# Altium PCB PCB1.PcbDoc
Units mil, origin at the board's own origin, x right, y up, seen from the top; angles counter-clockwise.
Board outline 2845 x 3665 mil, 2 copper layers (Top Layer, Bottom Layer); 35 components, 23 nets, 94 pads, 9 vias.
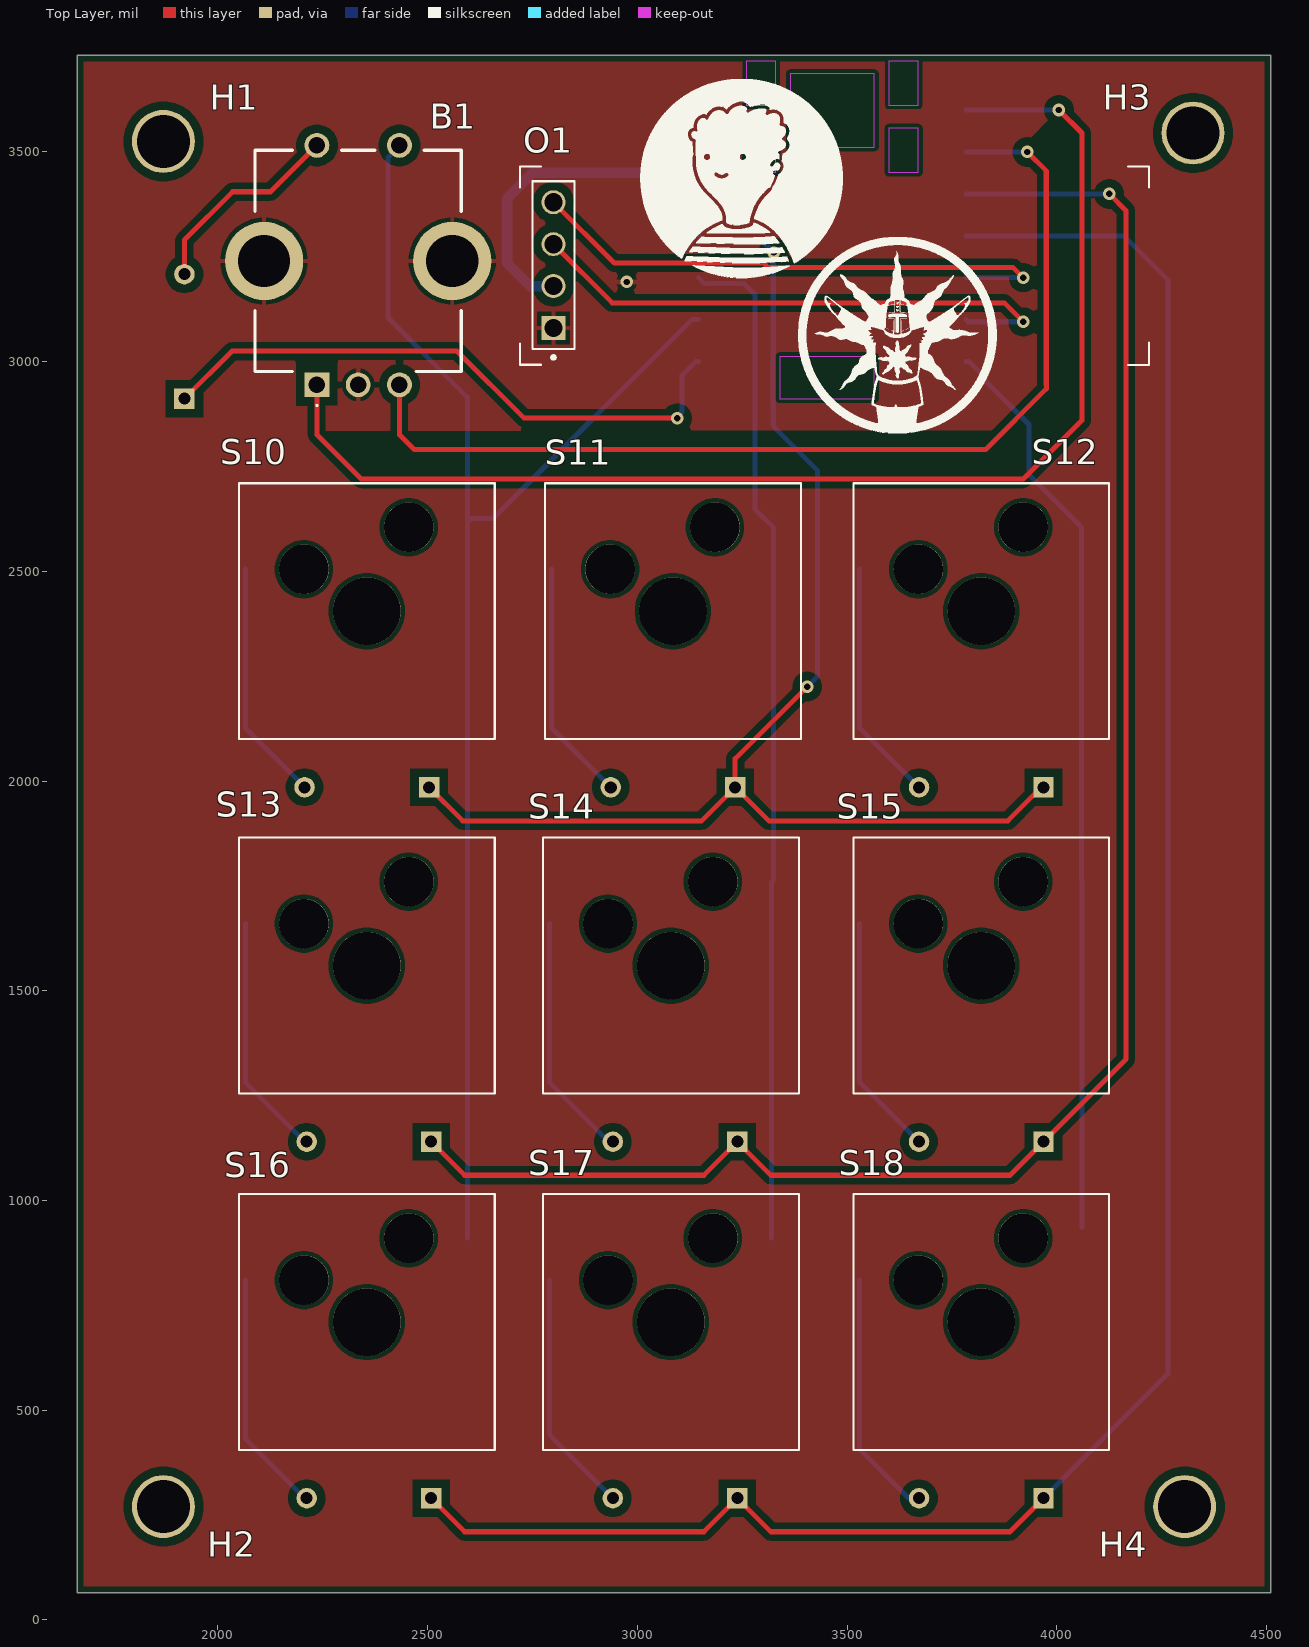
[diagram p0: Top Layer view]
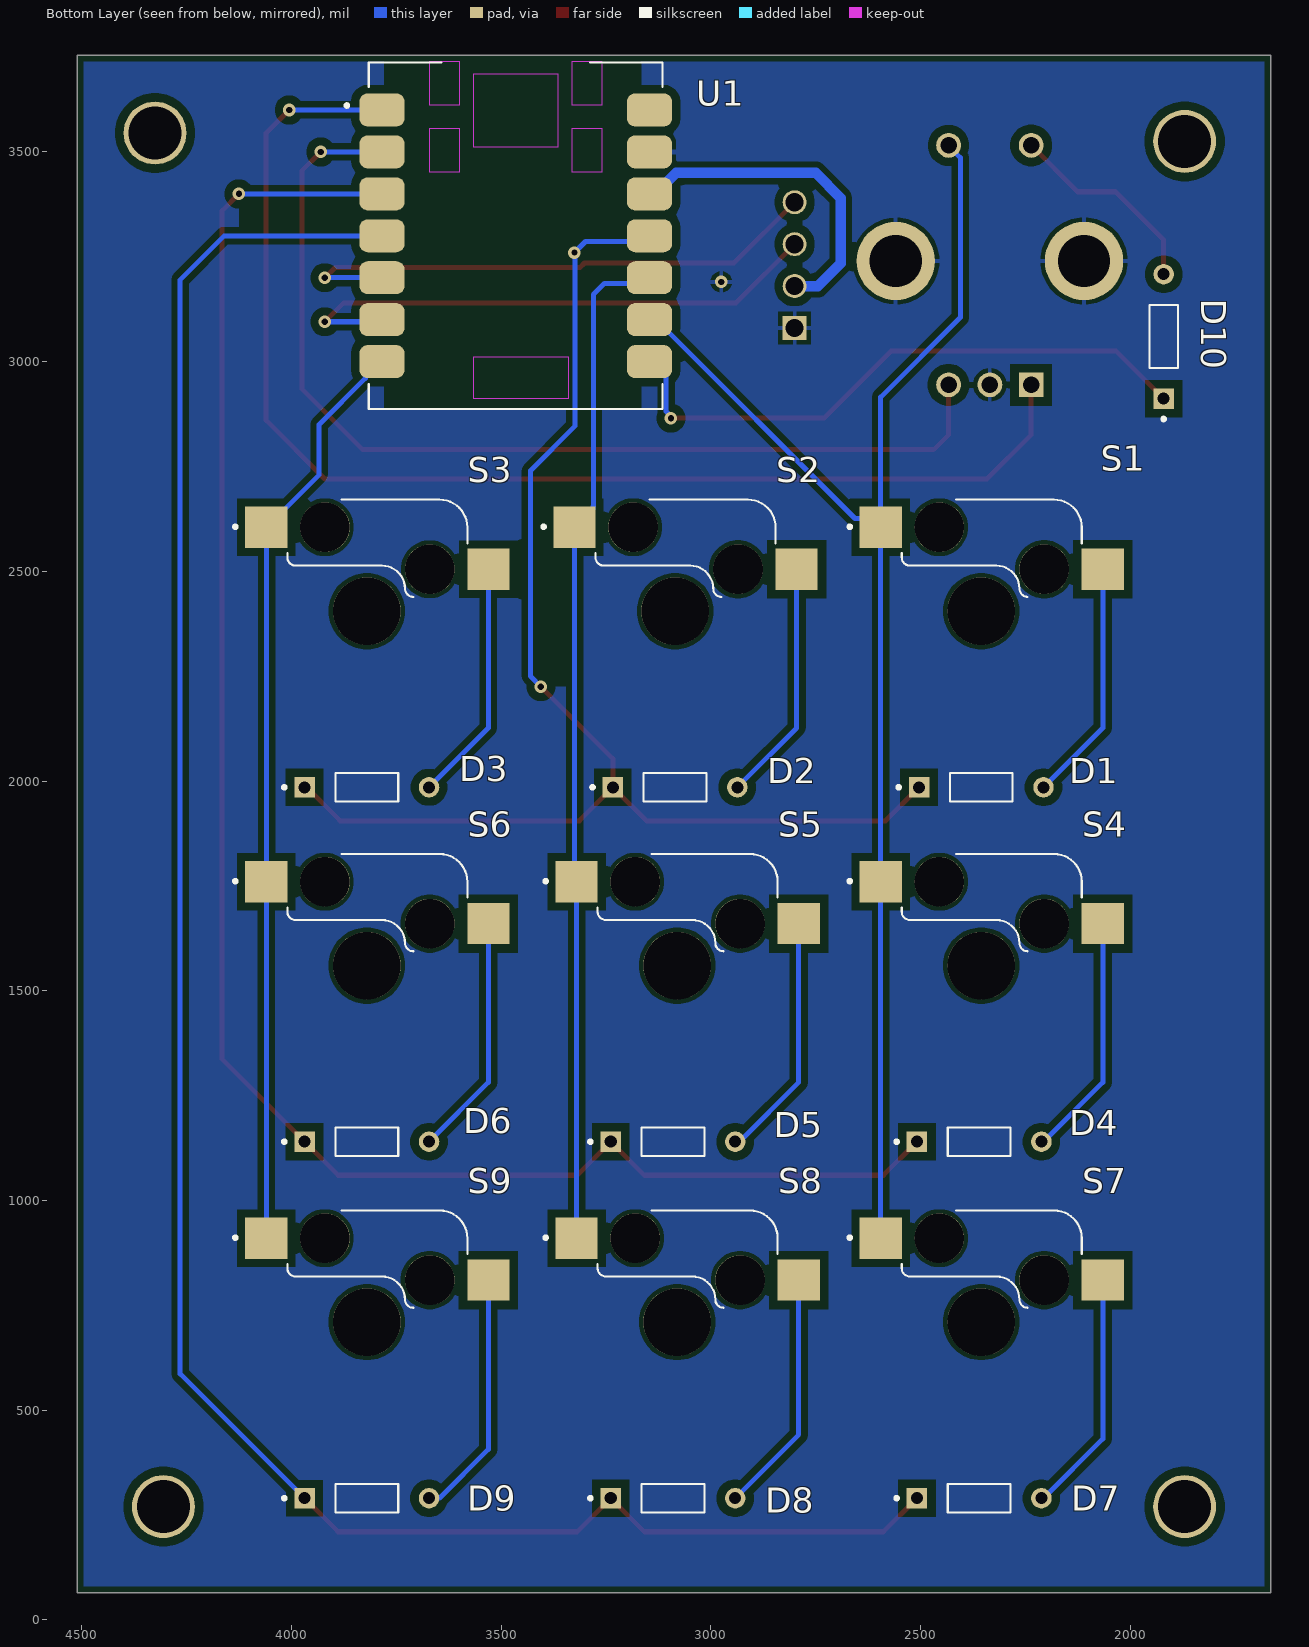
[diagram p1: Bottom Layer view, seen from below]
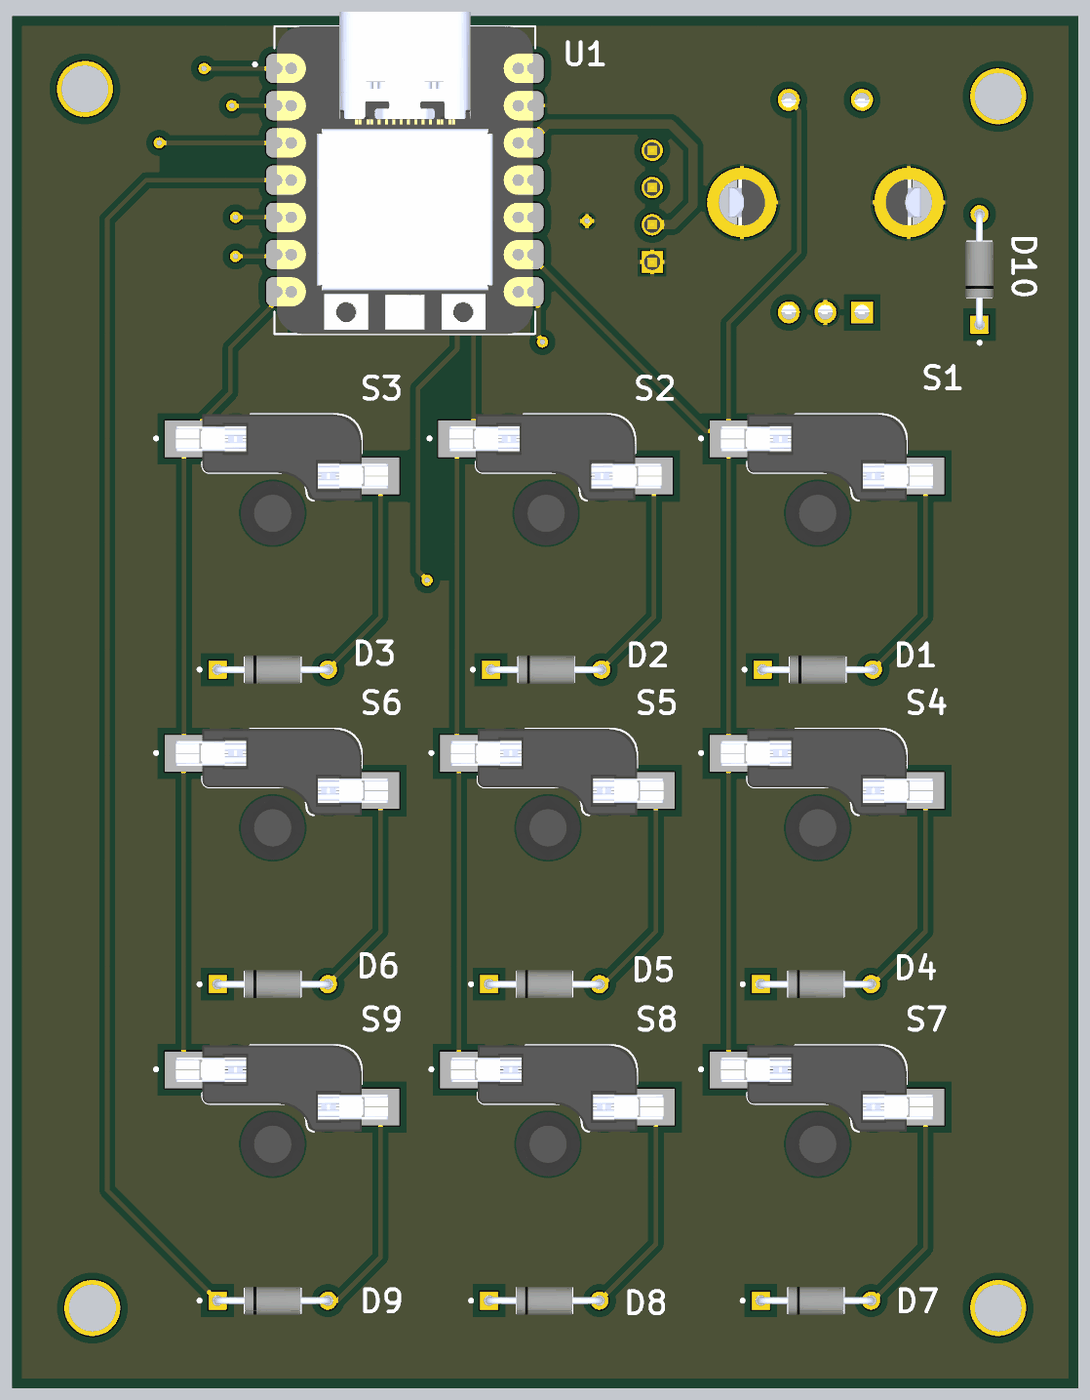
[diagram p2: 3D render of the assembled board from below, using the file's embedded part models]

## Layer stack, top to bottom
Top Solder: solder mask 0.4, Solder Resist, Dk 3.5
Top Layer: signal copper 1.4
Dielectric 1: dielectric 12.6, FR-4, Dk 4.8
Bottom Layer: signal copper 1.4
Bottom Solder: solder mask 0.4, Solder Resist, Dk 3.5

## Board outline
1665,65 4510,65 4510,3730 1665,3730

## Design rules (kind name [scope] priority, off if disabled: settings)
BoardOutlineClearance [All] p1: gap=10 ignorepadtopadclearanceinfootprint=FALSE except(0: Arc-SplitContinuation Track-SplitContinuation SMDPad-SplitContinuation THPad-SplitContinuation Via-SplitContinuation Fill-SplitContinuation Region-SplitContinuation Text-SplitContinuation; 15: Poly-OutlineEdge Poly-CavityEdge Poly-CutoutEdge Poly-SplitBarrior Poly-SplitContinuation)
Clearance [All] p1: gap=10 ignorepadtopadclearanceinfootprint=FALSE except(15: Track-Poly; 20: Arc-Poly SMDPad-Poly THPad-Poly Via-Poly Fill-Poly Poly-Poly)
HoleSize [All] p1: absolutevalues=TRUE maxlimit=400 minlimit=1 maxpercent=80.000 minpercent=20.000
PolygonConnect [All] p1: connectstyle=Relief reliefconductorwidth=10 reliefentries=4 polygonreliefangle="90 Angle" airgapwidth=10
RoutingVias [All] p1: holewidth=28 width=50 viastyle="Through Hole" minholewidth=10 minwidth=20 maxholewidth=200 maxwidth=400
SolderMaskExpansion [All] p1: expansion=4 istentingtop=FALSE
SupplyNets "Schematic Supply Nets" [InNet('GND')] p1: voltage=0.000
Width [All] p1: maxlimit=100 minlimit=10 preferedwidth=12 minimp=50.000000 maximp=50.000000 favimp=50.000000
29 further rules are at their usual default settings.

## Components (designator, comment, footprint, x,y, rotation, side; value= is the part's Value field where it differs from the comment)
B1 "PEC11R-4325F-S0012" PEC11R-4315F-S0012 2235.98,2944.72 r0 top
D1 "1N4148" "1N4148 Diode" 2355,1985 r180 bottom
D2 "1N4148" "1N4148 Diode" 3085,1985 r180 bottom
D3 "1N4148" "1N4148 Diode" 3820,1985 r180 bottom
D4 "1N4148" "1N4148 Diode" 2360,1140 r180 bottom
D5 "1N4148" "1N4148 Diode" 3090,1140 r180 bottom
D6 "1N4148" "1N4148 Diode" 3820,1140 r180 bottom
D7 "1N4148" "1N4148 Diode" 2360,290 r180 bottom
D8 "1N4148" "1N4148 Diode" 3090,290 r180 bottom
D9 "1N4148" "1N4148 Diode" 3820,290 r180 bottom
D10 "1N4148" "1N4148 Diode" 1920,3060 r90 bottom
H1 "Tooling Hole" "Tooling Hole" 1870,3525 r0 top
H2 "Tooling Hole" "Tooling Hole" 1870,270 r0 top
H3 "Tooling Hole" "Tooling Hole" 4325,3545 r0 top
H4 "Tooling Hole" "Tooling Hole" 4305,270 r0 top
O1 "WINSTAR OLED Display" "WINSTAR OLED DISPLAY" 2950,3240 r0 top
S1 "PG151101S11" SW_PG151101S11 2330,2555 r180 bottom
S2 "PG151101S11" SW_PG151101S11 3060,2555 r180 bottom
S3 "PG151101S11" SW_PG151101S11 3795,2555 r180 bottom
S4 "PG151101S11" SW_PG151101S11 2330,1710 r180 bottom
S5 "PG151101S11" SW_PG151101S11 3055,1710 r180 bottom
S6 "PG151101S11" SW_PG151101S11 3795,1710 r180 bottom
S7 "PG151101S11" SW_PG151101S11 2330,860 r180 bottom
S8 "PG151101S11" SW_PG151101S11 3055,860 r180 bottom
S9 "PG151101S11" SW_PG151101S11 3795,860 r180 bottom
S10 "MX1A-11NN" SW_MX1A-11NN 2355,2405 r0 top
S11 "MX1A-11NN" SW_MX1A-11NN 3085,2405 r0 top
S12 "MX1A-11NN" SW_MX1A-11NN 3820,2405 r0 top
S13 "MX1A-11NN" SW_MX1A-11NN 2355,1560 r0 top
S14 "MX1A-11NN" SW_MX1A-11NN 3080,1560 r0 top
S15 "MX1A-11NN" SW_MX1A-11NN 3820,1560 r0 top
S16 "MX1A-11NN" SW_MX1A-11NN 2355,710 r0 top
S17 "MX1A-11NN" SW_MX1A-11NN 3080,710 r0 top
S18 "MX1A-11NN" SW_MX1A-11NN 3820,710 r0 top
U1 "xiao seeed rp2040" MODULE_102010428 3465,3300 r180 bottom

## Footprints (in the part's own frame and the unit in brackets; to place one, negate y for a bottom-side part, rotate by r counter-clockwise, add the part's x,y. Pads: shape width x height; smd on the part's side, far side on the other; paste and mask are expansions set on the pad)
"1N4148 Diode" [mm]
  round 1.238 hole 0.73: A(3.768,0)
  rect 1.238x1.238 / inner round 1.238 / far side rect 1.238x1.238 hole 0.73: K(-3.768,0)
  silkscreen extent -5.1,-0.86 1.9,0.86, body extent -4,-0.95 4,0.96, height 1.9
MODULE_102010428 [mm]
  rrect50% 2.75x2 smd: 1(-8.1,7.62) 2(-8.1,5.08) 3(-8.1,2.54) 4(-8.1,0) 5(-8.1,-2.54) 6(-8.1,-5.08) 7(-8.1,-7.62) 8(8.1,-7.62) 9(8.1,-5.08) 10(8.1,-2.54) 11(8.1,0) 12(8.1,2.54) 13(8.1,5.08) 14(8.1,7.62)
  Keep-Out Layer region: 3.175,-9.865 -2.54,-9.865 -2.54,-7.325 3.175,-7.325
  Keep-Out Layer region: -3.429,7.915 -5.207,7.915 -5.207,10.582 -3.429,10.582
  Keep-Out Layer region: -3.429,3.851 -5.207,3.851 -5.207,6.518 -3.429,6.518
  Keep-Out Layer region: 5.207,3.851 3.429,3.851 3.429,6.518 5.207,6.518
  Keep-Out Layer region: 5.207,7.915 3.429,7.915 3.429,10.582 5.207,10.582
  Keep-Out Layer region: 2.54,5.375 -2.54,5.375 -2.54,9.82 2.54,9.82
  silkscreen extent -10.33,-10.5 8.9,10.5, body extent -8.75,-10.5 8.75,11.5, height 4.41
PEC11R-4315F-S0012 [mm]
  round 1.5 hole 1: 1(0,14.5) 2(5,14.5) B1(5,0) C1(2.5,0)
  round 4.74 hole 3.16: 3(-3.2,7.5) 4(8.2,7.5)
  rect 1.5x1.5 hole 1: A1(0,0)
  silkscreen extent -3.75,-1.3 8.75,14.2, body extent -4.05,-0.13 9.14,14.62, height 24.5
SW_MX1A-11NN [mil]
  round 161 hole 161 unplated: ""(0,0)
  silkscreen extent -305,-305 305,305, body extent -305,-319 305,319, height 600
SW_PG151101S11 [mm]
  rect 2.55x2.5 smd: 1(-6.725,1.27) 2(6.725,-1.27)
  round 3 hole 3 unplated: ""(-3.175,1.27) ""(3.175,-1.27)
  silkscreen extent -8.7,-2.94 5.45,2.95, body extent -7.25,-2.95 7.25,2.95, height 1.85
"Tooling Hole" [mm]
  round 3.81 hole 3.2: 10(0,0)
"WINSTAR OLED DISPLAY" [mm] "WEA012832FWPP3N00000"
  rect 1.45x1.45 / inner round 1.45 / far side rect 1.45x1.45 hole 1.1: 1(-3.81,-4.064)
  round 1.45 hole 1.1: 2(-3.81,-1.524) 3(-3.81,1.016) 4(-3.81,3.556)
  silkscreen extent -5.84,-6.29 32.26,5.71, body extent -5.08,-5.33 -2.54,4.83, height 5.57

## Part data
B1: library part PEC11R-4315F-S0012, "Rotary Encoder Mechanical 12 Quadrature (Incremental) Vertical", Manufacturer_Name=Bourns, Mouser Part Number=652-PEC11R4325FS0012, Datasheet Link=https://www.bourns.com/docs/product-datasheets/pec11r.pdf, Geometry.Height=31.5mm, Manufacturer_Part_Number=PEC11R-4325F-S0012, Mouser Price/Stock=https://www.mouser.co.uk/ProductDetail/Bourns/PEC11R-4325F-S0012?qs=Zq5ylnUbLm4xKJFZnkQTMQ%3D%3D
D1 D2 D3 D4 D5 D6 D7 D8 D9 D10: "Diode Standard 75V 200mA Surface Mount SOD-523F", Package="AXIAL LEAD-2 ON Semiconductor", Check_prices=https://www.snapeda.com/parts/1N4148/Onsemi/view-part/?ref=eda, MF="ON Semiconductor", MP=1N4148, SnapEDA_Link=https://www.snapeda.com/parts/1N4148/Onsemi/view-part/?ref=snap
O1: "WEA012832FWPP3N00000", ComponentLink1Description="New link", ComponentLink1URL=https://www.soselectronic.com/pl-pl/products/winstar/wea012832fwpp3n00000-401631
S1 S2 S3 S4 S5 S6 S7 S8 S9: Package=Package, Check_prices=https://www.snapeda.com/parts/PG151101S11/Kailh/view-part/?ref=eda, MF=Kailh, MP=PG151101S11, SnapEDA_Link=https://www.snapeda.com/parts/PG151101S11/Kailh/view-part/?ref=snap
S10 S11 S12 S13 S14 S15 S16 S17 S18: "Switch,Key,SPST-NO,Keyboard,Low Profile,10mA,12VDC,Face Place Mount,Std Force", Package=None, Check_prices=https://www.snapeda.com/parts/MX1A-11NN/Cherry/view-part/?ref=eda, MF=Cherry, MP=MX1A-11NN, SnapEDA_Link=https://www.snapeda.com/parts/MX1A-11NN/Cherry/view-part/?ref=snap
U1: "RP2040 XIAO RP2040 series ARMÂ® CortexÂ®-M0+ MCU 32-Bit Embedded Evaluation Board", Package=None, Check_prices=https://www.snapeda.com/parts/102010428/Seeed+Technology+Co.%252C+Ltd/view-part/?ref=eda, MF="Seeed Technology Co., Ltd", MP=102010428, SnapEDA_Link=https://www.snapeda.com/parts/102010428/Seeed+Technology+Co.%252C+Ltd/view-part/?ref=snap

## Via types
v1: diameter 30, hole 15, Top Layer to Bottom Layer, 9 vias

## Nets (pads, with @x,y where several pads share a name; then routed paths per layer and width w, separated by ;. In a path a pad name is that pad's centre, name@x,y a point inside that pad or via, vN(x,y) a via of type N, cw(c..) or ccw(c..) an arc to the next point about the centre after c; other vN are vias at no path point)
COL_0: B1.2 S1.1 S4.1 S7.1 U1.9 | length 3445.8
  Bottom Layer w12: B1.2 2432.83,3513.99 2405,3486.15 2405,3105 2594.76,2915.24 S1.1@2594.76,2617.73 ; S7.1 S4.1 S1.1@2594.76,2604.02 ; S1.1 S1.1@2594.76,2617.73 ; U1.9 3130,3100 2655.93,2625.93 2602.96,2625.93 S1.1@2594.76,2617.73
COL_1: S2.1 S5.1 S8.1 U1.10 | length 2421.7
  Bottom Layer w12: U1.10 3159.79,3186.31 3253.69,3186.31 3280,3160 3280,2655.24 3280.57,2654.68 3280.57,2648.21 3323.78,2605 S2.1 3324.76,1765 S5.1 S8.1
COL_2: S3.1 S6.1 S9.1 U1.7 | length 2183.6
  Bottom Layer w12: U1.7 3791.26,3000 3823.58,2967.67 3823.58,2960.31 3933.78,2850.12 3933.78,2730 4058.78,2605 4058.78,1760.98 S6.1 S9.1@4059.76,935
GND: B1.3 B1.4 B1.C1 O1.1 U1.13
  other v1: 2975,3190
NetB1_1: B1.1 D10.A | length 491.1
  Top Layer w12: D10.A 1920,3290 2035,3405 2125.39,3405 B1.1
NetD1_A: D1.A S1.2 | length 578.6
  Bottom Layer w12: S1.2 2065.24,2126.4 D1.A
NetD2_A: D2.A S2.2 | length 578.6
  Bottom Layer w12: S2.2 2795.24,2126.4 D2.A
NetD3_A: D3.A S3.2 | length 578.6
  Bottom Layer w12: S3.2 3530.24,2126.4 D3.A
NetD4_A: D4.A S4.2 | length 578.6
  Bottom Layer w12: S4.2 2065.24,1281.4 D4.A@2206.63,1140
NetD5_A: D5.A S5.2 | length 578.6
  Bottom Layer w12: S5.2 2790.24,1281.4 D5.A@2931.63,1140
NetD6_A: D6.A S6.2 | length 578.6
  Bottom Layer w12: S6.2 3530.24,1281.4 D6.A
NetD7_A: D7.A S7.2 | length 578.6
  Bottom Layer w12: S7.2 2065.24,431.4 D7.A@2206.63,290
NetD8_A: D8.A S8.2 | length 582.7
  Bottom Layer w12: S8.2 2790.24,441.4 D8.A
NetD9_A: D9.A S9.2 | length 568.2
  Bottom Layer w12: S9.2 3530.24,406.4 3646.63,290
ROT_0: B1.B1 U1.2 | length 2465.9
  Top Layer w12: B1.B1 2432.83,2825.59 2468.43,2790 3830,2790 3975.03,2935.03 3975.03,2944.97 ; v1(3930,3500) 3975,3455 3975,2945
  Bottom Layer w12: U1.2 v1(3930,3500)
ROT_1: B1.A1 U1.1 | length 3028.8
  Top Layer w12: B1.A1 2235.98,2825.59 2341.57,2720 3920,2720 4060,2860 4060,3545 v1(4005,3600)
  Bottom Layer w12: U1.1 v1(4005,3600)
ROW_0: D1.K D2.K D3.K U1.11 | length 3188.8
  Top Layer w12: D1.K 2583.37,1905 3153.37,1905 D2.K ; v1(3405,2225) 3233.37,2053.37 D2.K ; D3.K@3963.37,1985 3883.37,1905 3313.37,1905 D2.K
  Bottom Layer w12: U1.11 3159.79,3286.31 3298.69,3286.31 v1(3325,3260) 3324,3259 3324,2846 3430,2740 3430,2250 v1(3405,2225)
ROW_1: D4.K D5.K D6.K U1.3 | length 4291.7
  Top Layer w12: D4.K 2588.37,1060 3158.37,1060 D5.K 3318.37,1060 3888.37,1060 D6.K 4165,1336.63 4165,3360 v1(4125,3400)
  Bottom Layer w12: U1.3 v1(4125,3400)
ROW_2: D7.K D8.K D9.K U1.4 | length 5145
  Top Layer w12: D7.K 2588.37,210 3158.37,210 D8.K 3318.37,210 3888.37,210 D9.K
  Bottom Layer w12: U1.4 4160,3300 4265,3195 4265,586.63 D9.K
ROW_-1: D10.K U1.8 | length 1448.7
  Top Layer w12: D10.K 2033.37,3025 2570,3025 2730,2865 v1(3095,2865)
  Bottom Layer w12: v1(3095,2865) 3095,2869.61 3106.42,2881.03 3106.42,2967.67 3138.74,3000 U1.8
SCL: O1.3 U1.6 | length 1334.8
  Top Layer w12: O1.3 2940,3140 3875,3140 v1(3920,3095)
  Bottom Layer w12: U1.6 3788.9,3095 v1(3920,3095)
SDA: O1.4 U1.5 | length 1330.9
  Top Layer w12: O1.4@2799.82,3380.18 2945,3235 3301.16,3235 3312.16,3224 3896,3224 v1(3920,3200)
  Bottom Layer w12: U1.5 v1(3920,3200)
VIN: O1.2 U1.12 | length 778.9
  Bottom Layer w25: O1.2@2789.41,3180 2745,3180 2690,3235 2690,3390 2750,3450 3082.31,3450 3132.31,3400 U1.12
pads on no net: H1.10 H2.10 H3.10 H4.10 S1. S2. S3. S4. S5. S6. S7. S8. S9. S10. S11. S12. S13. S14. S15. S16. S17. S18. U1.14

## Polygon pours and split planes (outlines as drawn)
GND on Top Layer "NONET_L-01_P-001" (solid, pour order 0): 1665,65 1665,3730 4510,3730 4510,65
GND on Bottom Layer "NONET_L-01_P-001" (solid, pour order 1): 1665,65 1665,3730 4510,3730 4510,65

## Other copper
Top Layer:
  pour cut-out: 3930,3500 3930,3525 4005,3600 4060,3545 4060,2860 3920,2720 2340,2720 2340,2721.57 2226.57,2835 3875,2835 3975,2935 3975,3455
Bottom Layer:
  pour cut-out: 3325,2220 3330,2225 3405,2225 3430,2250 3430,2740 3324,2846 3323,2845 3280,2845 3280,2565 3315,2530
  pour cut-out: 4125,3400 4125,3305 4130,3300 3840,3300 3840,3400
  pour cut-out: 3165,3715 3165,2885 3780,2885 3780,3715

## Silkscreen, mask and mechanical layers (free items; w line width, h text height)
Top Overlay:
  drawing of 13 lines, arcs and shapes, not listed
Bottom Overlay:
  pour cut-out: 3865,3230 3870,3225 3870,3135 3880,3135 3920,3095 3920,3200 3915,3200 3880,3235
Board Shape:
  the board outline again, w20